# EAGLE board 527_faboblocks (EAGLE 9.6.2)
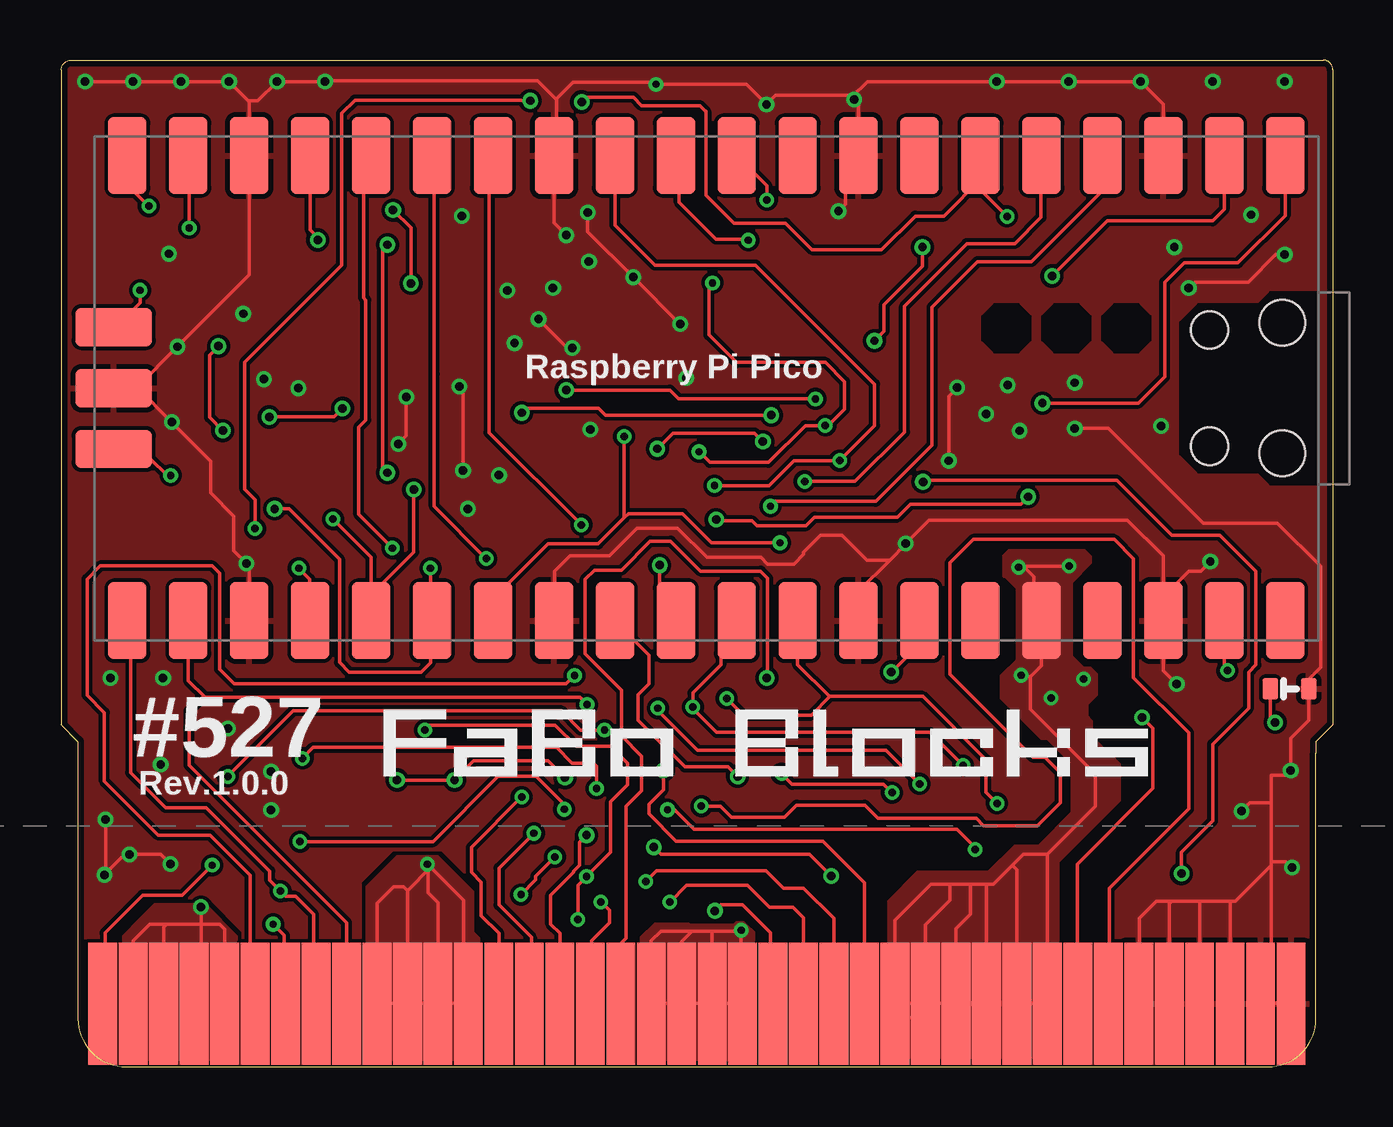
[diagram p0: board, top side]
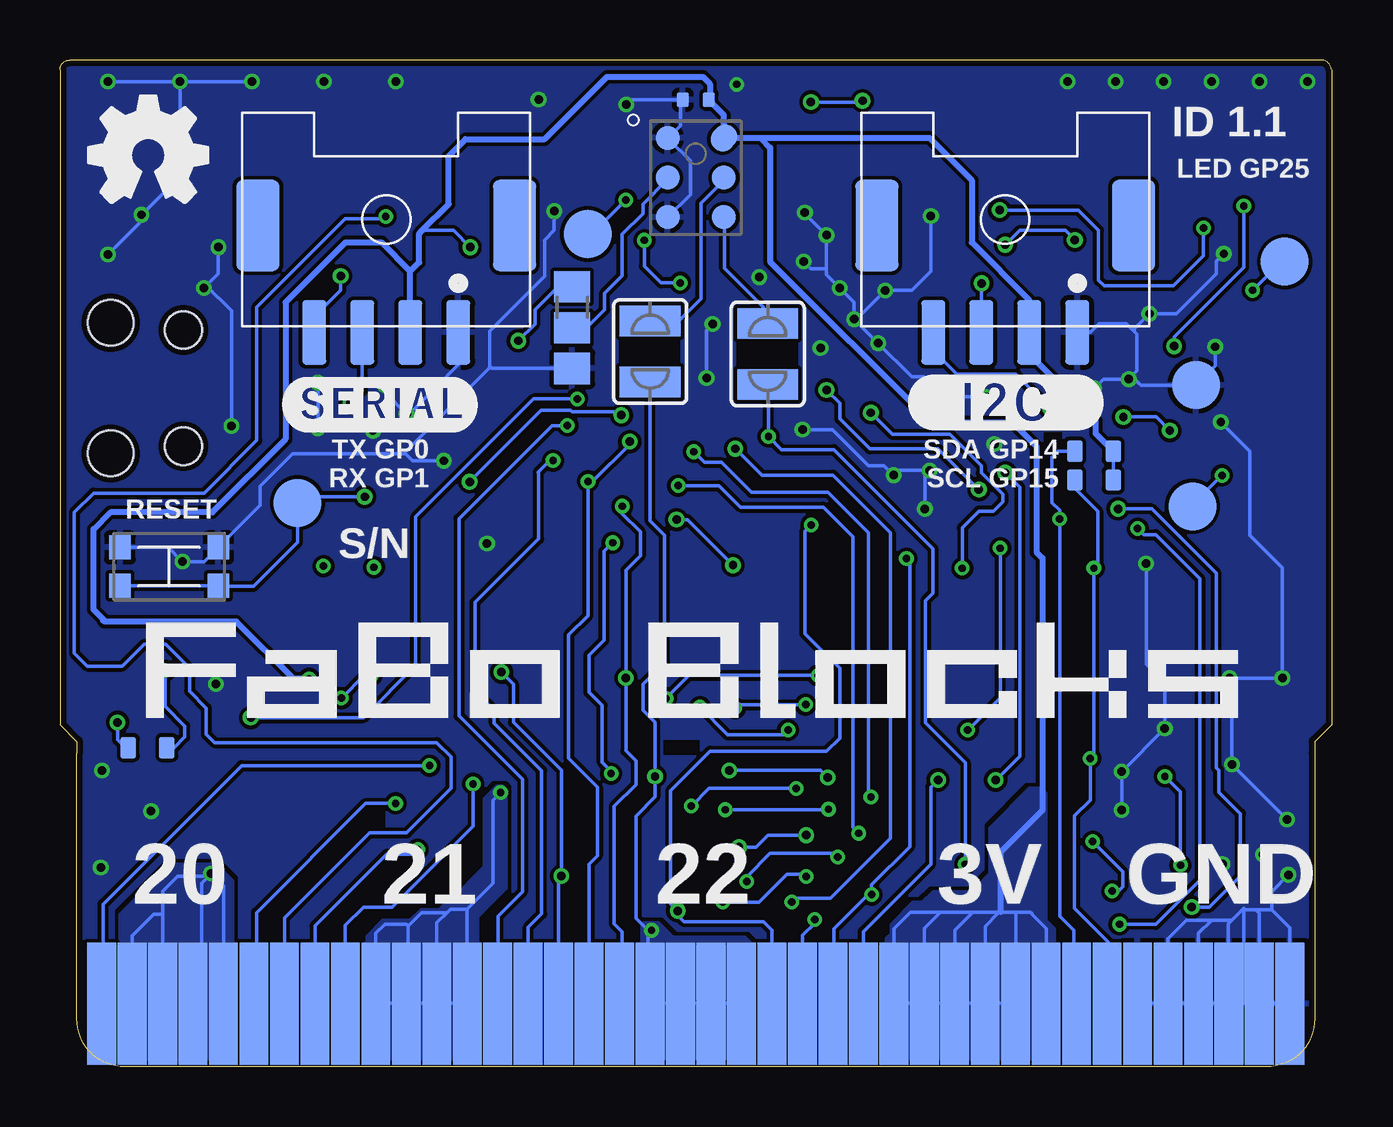
[diagram p1: board, bottom side, seen from below]

Size 53 x 41.95 mm. Coordinates in mm from the lower left corner, seen from the top.
Outline: 0.7,13.07 0.7,13.55 0,14.25 0,41.55 arc-77 0.4,41.95 52.6,41.95 arc-90 53,41.55 53,14.25 52.3,13.55 52.3,13.07
Copper layers (1*16): Top 0.035mm / dielectric 1.6mm / Bottom 0.035mm
Design rules "PCBway": minimum track width 6mil, minimum drill 12mil, track to track 6mil, track to pad 6mil, pad to pad 6mil, via to via 6mil, smd to smd 6mil, copper to edge 10mil, drill to drill 10mil, minimum pad ring 10mil, minimum via ring 6mil, stop-mask expansion 2mil, vias tented up to drill 100mil, thermal gap 8mil
bRestrict: area 22.2,29.2 to 24.8,30.2; area 27.1,29.3 to 29.7,30.3; area 11.2,25.8 to 12,26.4; area 39.5,10 to 40.2,10.6; area 38.1,8 to 38.9,8.6; area 26.4,13 to 27.1,13.6; area 27.1,13 to 27.9,13.6

## Footprints (pad centres in the part's own frame; a part is rotated, then mirrored left to right if it is on the bottom)
0402 = smd 0.5 x 0.6: 1 -0.55,0; 2 0.55,0
SM04B-PASS = smd 1 x 2.7: 1 3,-11.85; 2 1,-11.85; 3 -1,-11.85; 4 -3,-11.85 | smd 1.8 x 3.8: P$1 5.35,-7.4; P$2 -5.35,-7.4
TP20R = smd 2 x 2: TP 0,0
A0R-JMP = smd 1.5 x 1.3: 1 0,1.7; 2 0,0; 3 0,-1.7
0603 = smd 0.65 x 0.9: ANODE -0.8,0; CATHODE 0.8,0
0603' = smd 0.65 x 0.9: 1 -0.8,0; 2 0.8,0
KMR2 = smd 0.9 x 1: 1 -2.05,0.8; 2 2.05,0.8; 3 2.05,-0.8; 4 -2.05,-0.8
SJW = smd 1.27 x 2.54: 1 -1.27,0; 2 1.27,0
RASPBERRY_PI_PICO_SMD = smd 3.2 x 1.6: 1 -9.69,24.13; 2 -9.69,21.59; 3 -9.69,19.05; 4 -9.69,16.51; 5 -9.69,13.97; 6 -9.69,11.43; 7 -9.69,8.89; 8 -9.69,6.35; 9 -9.69,3.81; 10 -9.69,1.27; 11 -9.69,-1.27; 12 -9.69,-3.81; 13 -9.69,-6.35; 14 -9.69,-8.89; 15 -9.69,-11.43; 16 -9.69,-13.97; 17 -9.69,-16.51; 18 -9.69,-19.05; 19 -9.69,-21.59; 20 -9.69,-24.13; 21 9.69,-24.13; 22 9.69,-21.59; 23 9.69,-19.05; 24 9.69,-16.51; 25 9.69,-13.97; 26 9.69,-11.43; 27 9.69,-8.89; 28 9.69,-6.35; 29 9.69,-3.81; 30 9.69,-1.27; 31 9.69,1.27; 32 9.69,3.81; 33 9.69,6.35; 34 9.69,8.89; 35 9.69,11.43; 36 9.69,13.97; 37 9.69,16.51; 38 9.69,19.05; 39 9.69,21.59; 40 9.69,24.13 | smd 1.6 x 3.2: D1 -2.54,-24.7; D2 0,-24.7; D3 2.54,-24.7 | hole 1.9: 2.725,24; -2.725,24 | hole 1.55: 2.425,20.97; -2.425,20.97
SPM4050 = smd 1 x 1: 1:GND -1.169,1.651; 2:LEFT/RIGHT -1.169,0; 3:GND -1.169,-1.651; 4:CLOCK 1.169,-1.651; 5:DATA 1.169,0 | smd 1.15 x 1 rotated 45: 6:VDD 1.169,1.651
BBC_EDGE = smd 1.2 x 5.08: P$1 -50.215,2.673; P$2 -48.945,2.673; P$3 -47.675,2.673; P$4 -46.405,2.673; P$5 -45.135,2.673; P$6 -43.865,2.673; P$7 -42.595,2.673; P$8 -41.325,2.673; P$9 -40.055,2.673; P$10 -38.785,2.673; P$11 -37.515,2.673; P$12 -36.245,2.673; P$13 -34.975,2.673; P$14 -33.705,2.673; P$15 -32.435,2.673; P$16 -31.165,2.673; P$17 -29.895,2.673; P$18 -28.625,2.673; P$19 -27.355,2.673; P$20 -26.085,2.673; P$21 -24.815,2.673; P$22 -23.545,2.673; P$23 -22.275,2.673; P$24 -21.005,2.673; P$25 -19.735,2.673; P$26 -18.465,2.673; P$27 -17.195,2.673; P$28 -15.925,2.673; P$29 -14.655,2.673; P$30 -13.385,2.673; P$31 -12.115,2.673; P$32 -10.845,2.673; P$33 -9.575,2.673; P$34 -8.305,2.673; P$35 -7.035,2.673; P$36 -5.765,2.673; P$37 -4.495,2.673; P$38 -3.225,2.673; P$39 -1.955,2.673; P$40 -0.685,2.673 | smd 1.2 x 5.08 bottom: P$41 -0.685,2.673; P$42 -1.955,2.673; P$43 -3.225,2.673; P$44 -4.495,2.673; P$45 -5.765,2.673; P$46 -7.035,2.673; P$47 -8.305,2.673; P$48 -9.575,2.673; P$49 -10.845,2.673; P$50 -12.115,2.673; P$51 -13.385,2.673; P$52 -14.655,2.673; P$53 -15.925,2.673; P$54 -17.195,2.673; P$55 -18.465,2.673; P$56 -19.735,2.673; P$57 -21.005,2.673; P$58 -22.275,2.673; P$59 -23.545,2.673; P$60 -24.815,2.673; P$61 -26.085,2.673; P$62 -27.355,2.673; P$63 -28.625,2.673; P$64 -29.895,2.673; P$65 -31.165,2.673; P$66 -32.435,2.673; P$67 -33.705,2.673; P$68 -34.975,2.673; P$69 -36.245,2.673; P$70 -37.515,2.673; P$71 -38.785,2.673; P$72 -40.055,2.673; P$73 -41.325,2.673; P$74 -42.595,2.673; P$75 -43.865,2.673; P$76 -45.135,2.673; P$77 -46.405,2.673; P$78 -47.675,2.673; P$79 -48.945,2.673; P$80 -50.215,2.673

## Placement (x,y rotation side)
C1  0.1uF  [0402]  26.5,40.3 0 bottom
CN1  [SM04B-PASS]  39.4,42.45 0 bottom
CN2  [SM04B-PASS]  13.6,42.45 0 bottom
GND  TPSQTP20R  [TP20R]  5.65,28.4 0 bottom
GP7  TPSQTP20R  [TP20R]  31,34.7 0 bottom
JMP1  0R-JUMPA  [A0R-JMP]  31.65,30.8 0 bottom
LED1  [0603]  51.2,15.75 0 top
LOGO1  [LOGO_OSHW_M_BOTTOM]  49.31,37.99 0 top
R1  470  [0603']  49.35,13.3 180 bottom
R2  [0603']  9.9,25.65 0 bottom
R3  [0603']  9.9,24.45 0 bottom
RESET  TPSQTP20R  [TP20R]  43.1,23.5 0 bottom
S2  [KMR2]  48.45,20.84 180 bottom
SJ1  [SJW]  23.5,29.7 270 bottom
SJ2  [SJW]  28.4,29.8 270 bottom
SWDCLK  TPSQTP20R  [TP20R]  1.95,33.55 0 bottom
SWDIO  TPSQTP20R  [TP20R]  5.8,23.35 0 bottom
U1  [RASPBERRY_PI_PICO_SMD]  26.89,28.28 270 top
U$1  SPM0405H  [SPM4050]  26.5,37.05 0 bottom
U$2  BBC_EDGE  [BBC_EDGE]  51.95,-0.05 0 top

## Library data of the parts
C1 = FaBo-Capacitor
CN1 CN2 = FaBo-Connetor
GND GP7 RESET SWDCLK SWDIO = testpad
JMP1 = jump-0r-smd
LED1 = FaBo-LED
LOGO1 = FaBo-Logo
R1-R3 = FaBo-Resistors
S2 = FaBo-Switch
SJ1 SJ2 = jumper
U1 = FaBo-Boards
U$1 = FaBo-Sensor
U$2 = microbit

## Nets
3V3: C1.2 CN1.2 CN2.2 JMP1.1 R2.2 R3.2 U1.36 U$1.6:VDD U$2.P$27 U$2.P$28 U$2.P$29 U$2.P$30 U$2.P$31 U$2.P$32 U$2.P$67 U$2.P$68 U$2.P$69 U$2.P$70 U$2.P$71 U$2.P$72
A0: U1.31 U$2.P$1 U$2.P$41
A1: U1.32 U$2.P$6 U$2.P$46
A2: U1.34 U$2.P$16 U$2.P$56
D2: U1.4 U$2.P$18 U$2.P$58
D3: U1.5 U$2.P$17 U$2.P$57
D4: U1.6 U$2.P$7 U$2.P$47
D5_PWM: U1.7
D6_PWM: U1.9
D8: U1.11 U$2.P$14 U$2.P$54
D9_LEDS: U1.12 U$2.P$15 U$2.P$55
GND: C1.1 CN1.1 CN2.1 GND.TP JMP1.3 LED1.CATHODE S2.3 S2.4 U1.3 U1.8 U1.13 U1.18 U1.23 U1.28 U1.33 U1.38 U1.D2 U$1.1:GND U$1.3:GND U$2.P$35 U$2.P$36 U$2.P$37 U$2.P$38 U$2.P$39 U$2.P$40 U$2.P$75 U$2.P$76 U$2.P$77 U$2.P$78 U$2.P$79 U$2.P$80
GP14_I2C1_SDA: CN2.3 U1.19
GP15_I2C1_SCL: CN2.4 U1.20
GP16_PWM_UART0_TX: U1.21 U$2.P$8 U$2.P$48
GP17_PWM_UART0_RX: U1.22 U$2.P$9 U$2.P$49
GP20_BUZZER: U1.26 U$2.P$2 U$2.P$3 U$2.P$4 U$2.P$5 U$2.P$42 U$2.P$43 U$2.P$44 U$2.P$45
I2C1_SCL: R2.1 U1.25 U$2.P$33 U$2.P$73
I2C1_SDA: R3.1 U1.24 U$2.P$34 U$2.P$74
N$1: R1.1 U1.39
N$2: LED1.ANODE R1.2
N$3: GP7.TP U1.10
N$5: JMP1.2 U$1.2:LEFT/RIGHT
N$6: SJ1.1 U$1.4:CLOCK
N$7: SJ2.1 U$1.5:DATA
PDM_CLK: SJ1.2 U1.27 U$2.P$10 U$2.P$11 U$2.P$12 U$2.P$13 U$2.P$50 U$2.P$51 U$2.P$52 U$2.P$53
PDM_DIN: SJ2.2 U1.29 U$2.P$19 U$2.P$20 U$2.P$21 U$2.P$22 U$2.P$59 U$2.P$60 U$2.P$61 U$2.P$62
RESET: RESET.TP S2.1 S2.2 U1.30
RX: CN1.4 U1.2
SPI1_CSN: U1.17 U$2.P$26 U$2.P$66
SPI1_RX: U1.16 U$2.P$24 U$2.P$64
SPI1_SCK: U1.14 U$2.P$23 U$2.P$63
SPI1_TX: U1.15 U$2.P$25 U$2.P$65
SWCLK: SWDCLK.TP U1.D1
SWDIO: SWDIO.TP U1.D3
TX: CN1.3 U1.1

## Tracks (layer width: path | path; a pad name or v marks a point on that pad's centre or on a via)
3V3  (via drill 0.3, 0.35)
  Top 0.152: U$2.P$27 34.9,2.64 35.97,2.64 U$2.P$28 | U$2.P$29 37.34,2.64 38.56,2.64 | 39.78,2.64 U$2.P$31 | 40.84,2.64 39.93,2.64 U$2.P$31 | 40.84,2.64 41,2.64 U$2.P$32 | 36.45,2.64 37.19,2.64 U$2.P$29 | 36.45,2.64 36.12,2.64 U$2.P$28 | 40.84,2.64 U$2.P$32 | U$2.P$32 41.1,8.85 | 41.1,8.85 43.1,10.85 43.1,12.2 40.4,14.9 40.4,16.25 | 40.4,16.25 40.86,16.71 U1.36 40.55,18.9 40.55,20.41 40.1,20.86 | 41.1,8.85 40.1,8.85 39.65,8.4 | 38.6,7.6 38.85,7.6 39.65,8.4 | 38.6,7.6 37.9,7.6 | 37.9,7.6 37.05,7.6 | 37.05,7.6 36.25,7.6 34.75,6.1 34.75,2.2 34.9,2.05 35.86,2.05 36.45,2.64 | U$2.P$28 36.02,5.92 37.05,6.95 37.05,7.6 | U$2.P$29 37.3,5.74 37.9,6.35 37.9,7.6 | U$2.P$30 38.56,7.56 38.6,7.6 | U$2.P$31 39.84,8.21 39.65,8.4 | v42.02,20.86 40.1,20.86 | 40.1,20.86 39.97,20.86 v39.91,20.81 | 40.4,16.25 40.08,16.25 v40.02,16.31 | v35.9,34.15 35.9,33.35 34.3,31.75 34.3,30.65 v33.9,30.25
  Top 1.27: 38.56,2.64 U$2.P$30
  Bottom 0.152: 13.11,2.64 U$2.P$71 | U$2.P$70 14.33,2.64 13.26,2.64 U$2.P$71 | U$2.P$69 15.85,2.64 16.92,2.64 U$2.P$68 | U$2.P$67 18.14,2.64 17.07,2.64 U$2.P$68 | U$2.P$70 14.48,2.64 15.7,2.64 U$2.P$69 | 18.29,2.64 U$2.P$67 | R2.2 | 25.91,40.23 C1.2 | 25.45,38.76 U$1.6:VDD | R2.2 R3.2 | R2.2 9.3,25.85 | 32.15,32.7 32.05,32.7 32.25,32.5 | 32.25,32.5 JMP1.1 | U$1.6:VDD 24.89,38.7 | 25.18,38.85 U$1.6:VDD | U$2.P$70 14.44,5.86 13.9,6.4 | 13.9,6.4 13.85,6.45 13.8,6.45 13.1,6.45 | U$2.P$69 15.71,5.69 14.95,6.45 | 14.95,6.45 13.95,6.45 13.9,6.4 | U$2.P$68 16.98,5.77 16.3,6.45 | 16.3,6.45 14.95,6.45 | U$2.P$67 18.25,5.75 17.55,6.45 16.3,6.45 | v40.02,16.31 40.31,16.31 v41.27,15.36 42.06,16.16 v42.62,16.16 | 13.1,6.45 12.55,6.45 12.5,6.4 12.5,6.35 11.89,5.74 U$2.P$72 | 13.1,6.45 13.16,6.38 U$2.P$71 | CN1.2 38.32,30.68 | 37.9,34.85 36.6,34.85 v35.9,34.15 | v33.9,30.25 33.2,30.95 33.2,31.55 32.25,32.5
  Bottom 0.254: v42.62,16.16 43.26,16.16 45.65,18.55 51.15,18.55 | 51.2,18.6 51.15,18.55 | 51.15,18.55 51.15,18.6 51.6,19.05 51.6,22.4 50.9,23.1 46.65,23.1 43.6,26.15 43.6,31.85 41.1,34.35 39.6,34.35 38.4,33.15 | 23.8,38.7 U$1.6:VDD 25.33,39.65 25.91,40.23 25.91,40.95 26.2,41.25 30.2,41.25 32.8,38.65 36.1,38.65 36.8,37.95 36.8,35.95 37.9,34.85 38.03,34.72 38.03,33.52 38.4,33.15 | R2.2 9.83,26.38 9.83,26.91 12.6,29.68 CN2.2 12.6,31.95 15,34.35 15,36.95 16.75,38.7 23.8,38.7 | CN1.2 38.4,33.15 | 23.8,38.7 23.4,38.3 23.4,33.55 16.7,26.85 13.3,26.85 12.3,25.85 12.3,21.45 12.05,21.2 12.05,10.7 13.8,8.95 13.8,6.45
  pour Top (no thermals): 39.85,16.95 39.85,19.95 39.35,20.45 39.3,20.45 39.3,21.3 39.5,21.5 42.65,21.5 42.9,21.25 42.9,21 42.1,20.2 42.1,17.1 42.6,16.6 42.9,16.6 43.15,16.35 43.15,15.5 42.75,15.1 42.75,14.6 42.95,14.4 42.95,13.75 44.1,12.6 44.1,11.1 41.55,8.55 41.55,0.95 41,0.4 34.7,0.4 34.5,0.6 34.5,6.9 35.7,8.1 38.65,8.1 39.75,9.2 40.75,9.2 42.15,10.6 42.15,12.65 41.1,13.7 40.85,13.7 39.2,15.35 39.2,16.3
  pour Bottom (no thermals): 11.55,-0.1 11.55,5.75 11.9,6.1 11.9,11.4 12.1,11.6 12.6,11.6 14.25,9.95 14.25,8.05 15,7.3 16.6,7.3 17.05,6.85 17.45,6.85 18.35,5.95 18.35,5.55 18.55,5.35 18.55,0.05 18.1,-0.4 11.85,-0.4
A0  (via drill 0.3)
  Top 0.152: v37.6,12.55 36.22,13.93 27.32,13.93 26.33,14.92 v26.33,14.99 26.33,15.57 27.5,16.75 27.5,17.93 U1.31 28.04,18.49 | v6.3,8.4 5.05,7.15 3.4,7.15 1.83,5.58 1.83,2.64 U$2.P$1 | v22.65,14.03 21.65,14.03 20.85,14.83 9.68,14.83 v6.95,12.1
  Bottom 0.152: v37.6,12.55 45.43,12.55 51.21,6.77 51.21,2.64 U$2.P$41 | v6.95,12.1 6.3,11.45 v6.3,8.4 | v22.65,14.03 22.85,13.83 25.17,13.83 v26.33,14.99
A1  (via drill 0.3)
  Top 0.152: 8.23,2.64 U$2.P$6 7.88,3.09 7.88,7.98 7.86,8 | v21.4,16.3 21.05,15.95 7.22,15.95 6.61,16.57 6.61,20.56 6.3,20.87 1.63,20.87 1.08,20.31 1.08,15.48 1.8,14.76 1.8,11.9 4.05,9.65 6.21,9.65 7.86,8 | U1.32 30.7,16.75 32.02,15.43 32.05,15.43 | v27.74,15.34 28.44,14.65 31.27,14.65 32.05,15.43 | v39.01,10.97 38.55,11.43 38.55,12.8 35.91,15.43 32.05,15.43 | 7.86,8
  Bottom 0.152: 44.96,2.64 U$2.P$46 44.81,2.64 44.81,6.42 40.26,10.97 v39.01,10.97 | v21.4,16.3 26.78,16.3 v27.74,15.34
A2  (via drill 0.35)
  Top 0.152: 35.78,17.33 U1.34 | U1.34 36.25,18.12 | U1.34 35.78,17.63 v34.6,16.45 | U$2.P$16 20.79,5.56 20.4,5.95 20.4,7.15 21.36,8.11 21.36,8.15 21.6,8.38 21.6,9.35 v21.9,9.65 | v24.7,9.15 25,8.85 31.2,8.85 v32.1,7.95
  Bottom 0.152: v34.6,16.45 34.1,15.95 34.1,14.35 32.1,12.35 v32.1,7.95 32.22,7.83 U$2.P$56 | v21.9,9.65 23.5,9.65 24,9.15 v24.7,9.15
D2  (via drill 0.3, 0.35)
  Top 0.152: 23.47,2.64 U$2.P$18 | 43.28,36.47 43.28,37.84 U1.4 43.4,36.5 40.45,33.55 38.2,33.55 36.3,31.65 36.3,25.9 33.95,23.55 29.76,23.55 v29.56,23.35 | U$2.P$18 23.37,2.66 | U$2.P$18 23.32,5.12 23.55,5.35 23.55,10.85 24.2,11.5 24.2,12.95 23.35,13.8 23.35,14.1 23.37,14.11 23.37,15.69 21.85,17.22 21.85,20.31 22.23,20.7 23.35,20.7 24.55,21.9 25.4,21.9 26.65,20.65 29.15,20.65 29.45,20.35 29.45,16.23 v29.41,16.2
  Bottom 0.152: v29.56,23.35 29.56,23.05 28.8,22.29 28.8,21.29 29.41,20.68 v29.41,16.2 29.41,13.16 29,12.75 29,11.75 29.9,10.85 29.9,5.96 29.57,5.63 29.57,2.64 U$2.P$58
D3  (via drill 0.3, 0.35)
  Top 0.152: v30.99,24.39 33.09,24.39 35.15,26.45 35.15,31.7 37.75,34.3 39.75,34.3 40.84,35.39 40.84,37.84 U1.5 | 22.5,2.8 22.18,2.67 | 22.18,2.67 U$2.P$17 | v29.25,26.05 28.9,26.4 25.5,26.4 v24.85,25.75 | v22.5,6.87 22.85,6.51 22.85,6 22.1,5.25 22.1,2.75 22.18,2.67
  Bottom 0.152: 30.99,2.66 U$2.P$57 30.95,8.44 30.6,8.79 30.6,11.65 31.8,12.85 31.8,18 31,18.8 31,24.38 v30.99,24.39 30.81,24.39 29.25,25.95 v29.25,26.05 | v22.5,6.87 22.35,7.02 20.9,7.02 18.39,9.53 18.39,22.25 20.79,24.65 23.75,24.65 v24.85,25.75
D4  (via drill 0.3, 0.35)
  Top 0.152: 9.45,2.64 U$2.P$7 9.3,2.64 9.3,5.48 v8.84,5.94 | 38.41,37.05 38.41,36.45 v39.42,35.43 | U1.6 38.41,37.84 38.41,37.05 | 26.88,39.8 26.88,36.32 28.05,35.15 30.2,35.15 31.3,34.05 34.2,34.05 35.6,35.45 36.8,35.45 38.41,37.05 | 26.88,39.8 26.88,39.81 | v8.08,22.42 8.08,23.62 7.65,24.05 7.65,29.35 11.69,33.39 11.69,39.72 12.25,40.28 19.2,40.28 19.23,40.25 v19.55,40.25 | v21.7,40.2 21.73,40.17 21.95,40.4 23.85,40.4 24.2,40.05 26.63,40.05 26.88,39.8
  Bottom 0.152: U$2.P$47 43.74,2.64 44.04,2.94 U$2.P$47 | v39.42,35.43 39.52,35.33 41.12,35.33 44.8,31.65 44.8,26.1 47,23.9 51.6,23.9 52.4,23.1 52.4,17.23 51.86,16.7 50.4,16.7 49.5,17.6 48.6,17.6 47.6,16.6 47.6,15.65 46.9,14.95 46.9,13.85 46.56,13.51 37.3,13.51 36.7,12.91 36.7,11.6 38.55,9.75 40.1,9.75 43.65,6.2 U$2.P$47 | v8.84,5.94 7.33,5.94 5.49,7.78 5.49,20.33 7.33,22.17 7.83,22.17 v8.08,22.42 | v21.7,40.2 19.6,40.2 v19.55,40.25
D8  (via drill 0.3)
  Top 0.152: 18.14,2.64 U$2.P$14 | v28.64,34.44 28.59,34.49 27.29,34.49 25.76,36.02 25.76,37.84 U1.11 | 18.29,2.64 U$2.P$14 | v26.58,25.63 27.03,25.18 29.48,25.18 31.02,26.72 v31.85,26.72 31.97,26.72 32.65,27.4 32.65,28.55 31.85,29.35 28.15,29.35 27,30.5 27,32.51 v27.15,32.66 | U$2.P$14 18.25,5.55 17.5,6.3 17.5,7.7 17.1,8.1 17.1,9.14 v19.2,11.24
  Bottom 0.152: v27.15,32.66 27.95,32.66 28.64,33.36 v28.64,34.44 | v31.85,26.72 32.5,26.72 36.37,22.84 36.37,14.62 33.72,11.97 33.72,7.3 34.75,6.27 34.75,2.64 U$2.P$54 | v19.2,11.24 19.3,11.34 19.3,22.24 20.98,23.93 24.18,23.93 25.43,25.18 26.13,25.18 v26.58,25.63
D9_LEDS  (via drill 0.3)
  Top 0.152: U$2.P$15 19.61,2.71 19.61,5.39 18.25,6.75 18.25,8.27 v19.71,9.73 | v27.23,24.21 29.5,24.21 30.54,25.25 v32.45,25.25 33.9,26.71 33.9,28.45 28.95,33.4 24.75,33.4 23.08,35.07 U1.12
  Bottom 0.152: v32.45,25.25 32.52,25.33 33.05,24.8 | 33.07,24.78 33.05,24.8 | 33.38,2.64 U$2.P$55 33.48,5.8 32.92,6.37 32.92,12.33 34.91,14.32 34.91,14.85 35.7,15.65 35.7,19.35 33.05,22 33.05,24.8 | v19.71,9.73 19.96,9.98 19.96,22.09 21.18,23.31 24.63,23.31 25.53,24.21 v27.23,24.21
GND  (via drill 0.3, 0.35)
  Top 0.152: U$2.P$35 44.96,2.64 44.95,2.65 44.95,6.2 45.65,6.9 46.3,6.9 | U$2.P$40 51.21,2.64 50.44,2.64 50.44,8.4 | 50.44,11 50.44,12.15 51.05,12.15 v51.25,12.35 51.25,13.7 52,14.45 LED1.CATHODE 52,16.15 52.5,16.65 52.5,20.85 50.7,22.65 47.6,22.65 43.65,26.6 v42.25,26.6 | 50.44,11 50.44,8.55 | 50.44,8.55 50.44,8.4 | 45.94,39.23 U1.3 45.94,40.11 v45,41.05 v42,41.05 v39,41.05 33.6,41.05 32.95,40.4 | 3.16,28.32 v4.62,26.86 6.24,25.24 6.24,23.91 7.2,22.95 7.2,21.5 v7.72,20.97 7.84,20.86 U1.23 | 20.54,17.46 U1.28 20.57,18.64 20.57,20.65 21.22,21.3 22.85,21.3 24,22.45 25.7,22.45 26.92,21.22 29.17,21.22 29.45,20.95 30.55,20.95 30.95,21.35 30.95,21.45 31.65,22.15 32.55,22.15 33.59,21.11 34.54,21.11 | 3.16,28.32 2.69,27.84 2.29,28.24 2.23,28.24 U1.D2 | U1.33 33.24,19.81 34.54,21.11 | U1.38 45.94,21.28 44.45,22.77 36.18,22.77 v35.2,21.8 35.2,21.77 34.54,21.11 | U1.18 7.84,37.91 | U1.18 7.84,32.99 v4.85,30 3.16,28.32 | 20.62,40.32 19.86,41.08 11.04,41.08 v11,41.05 v9,41.05 8.2,40.25 7.8,40.25 | 20.62,40.32 20.65,40.3 20.65,38.08 U1.13 20.54,35.16 v21.05,34.65 | 20.62,40.32 21.33,41.03 24.7,41.03 v24.8,40.93 28.56,40.93 v29.4,40.1 29.78,40.48 32.87,40.48 32.95,40.4 | 50.44,8.4 48.94,6.9 48.7,6.9 | v37.35,28.3 37,27.95 v37,25.25 | v1,41.05 v3,41.05 v5,41.05 v7,41.05 7.8,40.25 | 7.8,40.25 7.84,40.21 U1.18 | v1.85,10.3 1.85,8.05 v1.8,8 2.65,8.85 v2.85,8.85 4.15,8.85 v4.55,8.45 | v21.95,35.6 21.95,34.8 v23.85,32.9 v25.8,30.95 | v51.3,8.3 51.05,8.55 50.44,8.55 | v49.2,10.65 49.55,11 50.44,11 | v46.5,15.95 45.94,16.51 U1.38 | v14.05,25.95 14.39,26.29 v14.39,27.91 | v16.75,24.85 16.75,28.2 v16.6,28.35
  Top 0.152: U1.8 33.24,38.15 | 33.24,38.15 33.24,40.11 v33.05,40.3 32.95,40.4 | v32.4,35.65 32.7,35.95 32.7,37.61 33.24,38.15 | v47,32.45 47.24,32.69 49.48,32.69 50.63,33.85 v51,33.85 | v21.3,29.95 21.1,29.95 v19.9,31.15 | 46.3,6.9 47.4,6.9 | 47.4,6.9 48.7,6.9 | U$2.P$36 46.19,6.78 46.3,6.9 | U$2.P$37 47.45,6.84 47.4,6.9 | U$2.P$38 48.73,6.87 48.7,6.9 | v47.9,21.05 47.5,20.65 47,20.65 45.94,19.59 U1.38
  Bottom 0.152: U$2.P$79 2.9,2.64 1.83,2.64 U$2.P$80 1.74,5.78 2.5,6.55 | 4.3,2.62 4.42,2.64 5.49,2.64 U$2.P$77 | 4.3,2.62 U$2.P$78 4.27,2.64 3.66,2.64 | U$2.P$76 6.71,2.64 5.64,2.64 U$2.P$77 | U$2.P$76 6.86,2.64 8.08,2.64 U$2.P$75 | 3.66,2.64 3.05,2.64 U$2.P$79 | 27.13,40.23 27.13,39.21 27.58,38.76 U$1.1:GND | 27.13,40.23 27.13,40.28 29.22,40.28 v29.4,40.1 | 27.13,40.23 C1.1 | U$1.1:GND 27.58,38.6 26.72,37.74 26.72,36.34 U$1.3:GND | 35.06,29.16 35.1,29.16 35.1,30.65 32.8,32.95 32.8,34.45 32.4,34.85 v32.4,35.65 | 27.74,38.6 U$1.1:GND | 3.66,6.55 3.66,6.6 4.18,6.08 | 3.66,6.55 3.66,2.64 | 35.06,29.16 38.63,25.58 | 38.63,25.58 38.67,25.55 43.3,25.55 44.65,24.2 44.65,23.39 S2.4 46.99,21.05 v47.9,21.05 48.49,21.64 S2.3 | 4.18,6.08 4.3,5.95 4.3,2.62 | U$2.P$77 5.54,5.55 5,6.1 | 5,6.1 4.2,6.1 4.18,6.08 | U$2.P$76 6.82,5.33 6.05,6.1 5,6.1 | 2.5,6.55 3.15,6.55 | 3.15,6.55 3.66,6.55 | U$2.P$79 3,6.4 3.15,6.55 | v37,25.25 38.3,25.25 38.63,25.58 | v51,33.85 49.6,35.25 v49.6,35.5 48,37.1 v48,41.05 | v48,41.05 v51,41.05 | v48,41.05 v45,41.05 | v1.8,8 2.5,7.3 2.5,6.55 | v21.95,35.6 21.95,35.55 v21.05,34.65 21.05,33.25 | v16.95,23.25 16.95,24.65 v16.75,24.85 18.05,24.85 v18.25,24.65 18.65,25.05 19.3,25.05 20.8,26.55 v22.05,26.55 | CN2.1 10.06,30.6 9.69,30.97 8.55,30.97 8.22,30.63 | 8.32,28.77 8.11,28.99 8.11,30.52 8.22,30.63 | 8.32,28.77 v8.45,28.65 9.52,28.65 v9.89,28.27 | v14.39,27.91 16.16,27.91 v16.6,28.35 17,28.74 17.5,28.74 v18.9,30.15 v19.9,31.15 19.9,31.25 | CN1.1 36.4,29.25 v37.35,28.3 38.45,27.2 v38.55,27.2 | v38.55,27.2 39.25,26.5 v39.95,26.5 42.15,26.5 v42.25,26.6 v42.25,28.5 | v39.45,28.4 39.45,28.1 v38.55,27.2
  Bottom 0.152: 21.05,33.25 21.05,33 v20.5,32.45 19.9,31.85 19.9,31.25 | v22,33.55 21.7,33.25 21.05,33.25 | 19.9,31.25 19.7,31.25 v18.6,32.35 17.5,32.35 16.7,33.15 v16.7,35.45 | v4.49,33.87 4.8,33.56 4.8,33.05 6.47,31.37 v7.59,31.37 8.22,30.75 8.22,30.63 | v4.85,30 4.85,29.2 GND.TP 7.95,28.4 8.32,28.77 | v1.85,10.3 v4.15,12.6 4.15,16.1 v4.25,16.2 v2.05,16.2 2.05,20.8 3.4,22.15 3.4,25.65 v4.62,26.86 | v7.72,20.97 7.72,16.77 6.95,16 v6.95,14.1 v8.75,12.3 v8.75,10.7 | v26.05,28.7 26.05,30.7 v25.8,30.95 | v47,32.45 46.9,32.55 | 46.9,32.55 46.4,33.05 v46.4,34.15 | JMP1.3 35,29.1 35.06,29.16 | v45.85,26.7 45.85,31.5 46.9,32.55
  pour Top (rank 6): -7.05,54.3 60.9,54.3 60.9,-10.8 -7.05,-10.8
  pour Bottom (rank 6): -7.1,54.9 61.45,54.9 61.45,-11.45 -7.1,-11.45
GP14_I2C1_SDA  (via drill 0.3, 0.35)
  Top 0.152: v5.33,34.95 5.33,37.93 U1.19 | v13.83,35.7 14.58,34.95 v14.58,32.64
  Bottom 0.152: v5.33,34.95 5.33,33.79 6.6,32.53 9.48,32.53 9.71,32.77 9.71,34.85 10.56,35.7 v13.83,35.7 | CN2.3 14.6,32.62 v14.58,32.64
GP15_I2C1_SCL  (via drill 0.3, 0.35)
  Top 0.152: U1.20 2.76,36.76 v3.66,35.86 | v6.74,26.5 6.19,27.05 6.19,29.65 v6.56,30.02 | v11.73,27.43 11.37,27.07 v8.68,27.07
  Bottom 0.152: v3.66,35.86 3.66,33.31 6.56,30.41 v6.56,30.02 | v11.73,27.43 13.15,28.85 15.61,28.85 16.6,29.84 CN2.4 | v6.74,26.5 7.31,27.07 v8.68,27.07
GP16_PWM_UART0_TX  (via drill 0.3)
  Top 0.152: 10.67,2.64 U$2.P$8 10.52,2.64 10.52,6.35 9.77,7.1 9.36,7.1 v9.14,7.32 8.7,7.76 8.7,8.15 6.05,10.8 4.35,10.8 2.9,12.25 2.9,18.49 U1.21 | v38.09,9.05 38.09,9.15 37.34,9.9 26.38,9.9 25.57,10.71 v25.27,10.71 | v20.97,10.73 20.97,10.93 19.8,12.1 18.22,12.1 15.5,9.38 v9.95,9.38
  Bottom 0.152: v25.27,10.71 21.24,10.71 21.22,10.73 v20.97,10.73 | v9.14,7.32 8.89,7.32 8.7,7.51 8.7,8.13 v9.95,9.38 | U$2.P$48 42.37,2.64 42.37,5.87 39.39,8.85 38.29,8.85 v38.09,9.05
GP17_PWM_UART0_RX  (via drill 0.3)
  Top 0.152: v35.78,11.79 34.38,13.19 26.52,13.19 24.87,14.84 v24.87,14.94 | 6,15.39 21.62,15.39 v21.92,15.09 | 6,15.39 5.9,15.39 5.33,14.82 5.33,12.56 11.89,6 U$2.P$9 | U1.22 5.3,16.09 6,15.39
  Bottom 0.152: v21.92,15.09 24.72,15.09 v24.87,14.94 | 41,2.64 U$2.P$49 41.1,5.89 40.35,6.65 39.15,6.65 35.78,10.01 v35.78,11.79
GP20_BUZZER  (via drill 0.3, 0.35)
  Top 0.152: 15.39,18.64 v15.39,20.77 | 15.39,18.64 U1.26 | 5.83,3.61 5.83,5.95 | 5.83,5.95 v5.83,6.65 | v8.9,23.25 9.5,23.25 11.6,21.15 11.6,16.85 12,16.45 15,16.45 15.39,16.84 15.39,18.64 | v46.7,8.05 46.7,8.95 48,10.25 48,13.45 49.5,14.95 49.5,16.45 49.8,16.75 49.8,20.65 48.3,22.15 46.3,22.15 44,24.45 36,24.45 v35.92,24.37 | v29.6,27.15 22.7,27.15 22.4,27.45 19.4,27.45 v19.2,27.25 | U$2.P$2 3,5.25 3.7,5.95 4.4,5.95 | 4.4,5.95 5.83,5.95 | U$2.P$3 4.28,5.82 4.4,5.95 | U$2.P$5 6.82,5.73 6.6,5.95 5.83,5.95
  Bottom 0.152: v5.83,6.65 5.09,6.65 3.8,7.95 3.8,10.55 4.7,11.45 4.7,12.36 4.81,12.47 4.81,20.55 7.5,23.25 v8.9,23.25 | U$2.P$44 47.1,2.98 47.1,7.65 46.8,7.95 | 46.8,7.95 v46.7,8.05 46.19,7.53 U$2.P$45 | v35.92,24.37 32.95,27.35 31.72,27.35 31.66,27.29 29.75,27.29 v29.6,27.15 | v19.2,27.25 18.3,26.35 15.9,26.35 14.6,25.05 14.6,24.75 13.7,23.85 13.7,23.55 14.1,23.15 14.7,23.15 15.39,22.46 v15.39,20.77 | U$2.P$43 48.73,6.35 | 48.73,6.35 48.73,7.32 48.1,7.95 46.8,7.95 | U$2.P$42 49.99,5.45 49.1,6.35 48.73,6.35
  pour Bottom (no thermals): 45.8,-0.35 45.8,7.75 46.5,8.45 48.4,8.45 49.3,7.55 50.5,6.35 50.5,-0.35 50.3,-0.55 46,-0.55
  pour Top (no thermals): 2.6,-0.35 2.6,5.45 3.3,6.15 3.9,6.75 6,6.75 7.3,5.45 7.3,-0.15 6.8,-0.65 2.9,-0.65
I2C1_SCL  (via drill 0.3, 0.35)
  Top 0.152: v31.44,27.83 25.74,27.83 25.37,28.2 v21.05,28.2 | U$2.P$33 42.35,2.65 42.35,8.45 45.5,11.6 45.5,14.1 v45.05,14.55 | v11.33,22.82 12.92,21.23 U1.25 12.92,19.67 14.7,21.45 v14.7,24.05
  Bottom 0.152: 10.52,2.64 U$2.P$73 10.67,2.64 10.67,1.98 10.7,1.95 10.75,1.95 10.75,5.7 11.33,6.28 v11.33,22.82 11.33,23.18 11.65,23.5 11.65,25.4 11.4,25.65 R2.1 | v31.44,27.83 33.25,27.83 38.17,22.91 38.17,16.73 40.35,14.55 v45.05,14.55 | v14.7,24.05 16.4,25.75 19.25,25.75 20.5,27 20.5,27.65 v21.05,28.2
I2C1_SDA  (via drill 0.3)
  Top 0.152: v9.91,20.77 10.36,20.32 10.36,18.64 U1.24 | v10.06,12.85 10.51,13.3 20.64,13.3 21.3,12.65 22.2,12.65 22.32,12.53 v22.32,11.59 | 43.74,2.64 U$2.P$34 43.7,2.68 43.7,7.45 47,10.75 47,13.91 44.7,16.21 44.7,21.16 43.9,21.97 38.02,21.97 37.05,21 37.05,16.35 40.5,12.9 41,12.9 41.65,12.25 41.65,11 40.7,10.05 38.45,10.05 38.15,10.35 34.05,10.35 33.5,10.9 30.65,10.9 30.15,10.4 27.95,10.4 27.49,10.86 v26.68,10.86
  Bottom 0.152: v10.06,12.85 10.06,11.11 10.71,10.45 10.71,6.61 9.25,5.15 9.25,2.7 | 9.25,2.7 9.14,2.79 9.3,2.64 U$2.P$74 9.25,2.7 | v26.68,10.86 25.95,11.59 v22.32,11.59 | v10.06,12.85 9.91,12.85 v9.91,20.77 9.75,20.93 9.75,23.15 10.7,24.1 R3.1 | v10.06,12.85
N$1  (via drill 0.3)
  Top 0.152: v48.62,16.51 48.48,16.64 U1.39
  Bottom 0.152: 48.62,13.31 R1.1 48.25,13.3 47.8,13.75 47.8,14.2 48.62,15.01 v48.62,16.51
N$2  (via drill 0.35)
  Top 0.152: v50.6,14.35 50.4,14.55 LED1.ANODE
  Bottom 0.152: R1.2 50.29,13.31 50.6,13.61 v50.6,14.35
N$3  (via drill 0.3)
  Top 0.152: U1.10 29.41,36.71 v29.41,36.12
  Bottom 0.152: GP7.TP 30.83,34.7 v29.41,36.12
N$5
  Bottom 0.152: U$1.2:LEFT/RIGHT 27.67,36.98 28.7,35.95 28.7,35.55 29.57,34.68 29.57,32.96 30.3,32.23 30.3,31.55 31.05,30.8 JMP1.2
N$6
  Bottom 0.152: U$1.4:CLOCK 25.3,35.25 25.3,33.27 23.7,31.67 SJ1.1
N$7
  Bottom 0.152: SJ2.1 27.23,31.07 26.29,32.01 26.29,35.98 25.45,36.82 25.45,36.93 U$1.5:DATA
PDM_CLK  (via drill 0.3)
  Top 0.152: U$2.P$11 14.33,2.64 13.26,2.64 U$2.P$10 13.16,6.81 13.85,7.5 14.27,7.5 14.44,7.33 | U$2.P$12 15.85,2.64 16.92,2.64 U$2.P$13 16.77,2.83 16.77,6.94 15.4,8.3 | U$2.P$11 14.48,2.64 15.7,2.64 U$2.P$12 | U1.27 18,19.5 | 18,19.5 18,19.76 | v15.27,8.44 15.3,8.4 | 15.3,8.4 15.4,8.3 | v34.63,11.42 34.28,11.77 30.47,11.77 v30.03,12.21 | 29.91,21.78 v29.96,21.83 27.11,21.83 25.9,23.05 23.65,23.05 23.47,22.87 | 18,19.5 20.29,21.78 22.39,21.78 23.47,22.87 | v23.47,26.26 23.47,22.87 | U$2.P$11 14.44,7.33 | 14.44,7.33 15.4,8.3 | U$2.P$12 15.71,6.84 15.3,7.25 15.3,8.4
  Bottom 0.152: 38.71,2.64 39.78,2.64 U$2.P$50 39.84,5.56 39.45,5.95 38.55,5.95 38.48,5.87 | U$2.P$52 37.19,2.64 36.12,2.64 U$2.P$53 | 38.5,2.64 37.34,2.64 U$2.P$52 | 38.5,2.64 38.56,2.64 U$2.P$51 | SJ1.2 23.47,28.4 v23.47,26.26 22.92,25.71 20.75,25.71 16.61,21.58 16.61,19.72 16.92,19.41 16.92,14.33 15.27,12.67 v15.27,8.44 | v30.03,12.21 30.03,12.31 30.31,12.59 30.33,12.61 30.41,12.69 30.41,15.05 30.95,15.6 30.95,17.15 30.33,17.77 30.33,21.47 v29.96,21.83 | 35.97,2.64 U$2.P$53 | U$2.P$53 36.02,6.57 | v34.63,11.42 34.95,11.1 34.95,7.65 36.02,6.57 | 36.02,6.57 36.73,6.57 36.88,6.42 | U$2.P$52 37.3,6 36.88,6.42 | 36.88,6.42 37.92,6.42 38.48,5.87 | 38.5,2.64 38.5,5.85 38.48,5.87
  pour Bottom (no thermals): 35.7,0.2 35.6,0.3 35.6,5.9 35.6,6.25 34.8,7.05 34.4,7.45 34.4,10.55 34.4,11.55 34.5,11.65 34.55,11.7 34.8,11.7 35.3,11.2 35.3,8.35 36.7,6.95 36.8,6.95 37.2,6.55 37.95,6.55 38.4,6.1 39.2,6.1 39.55,6.1 40.2,5.45 40.2,-0.05 39.8,-0.45 38.95,-0.45 36.35,-0.45
  pour Top (no thermals): 12.75,-0.35 12.75,7.5 13.95,8.7 14,8.75 15.7,8.75 17.15,7.3 17.15,5.6 17.4,5.35 17.4,5.1 17.4,-0.15 17.3,-0.25 17.05,-0.5 12.95,-0.5 12.9,-0.5
PDM_DIN  (via drill 0.3, 0.35)
  Top 0.152: U$2.P$62 24.69,2.64 25.76,2.64 U$2.P$61 | 28.35,2.64 27.28,2.64 U$2.P$21 | U$2.P$61 25.91,2.64 27.13,2.64 U$2.P$21 | U1.29 24.51,17.16 24.51,15.96 24.05,15.5 24.05,14.45 26,12.5 27.8,12.5 v28.2,12.1 | 24.54,2.64 U$2.P$62 | v28.35,5.69 28.35,5.65 | 28.35,5.65 28.35,2.64 | 28.35,2.64 U$2.P$22 | U$2.P$61 25.86,5.21 26.3,5.65 | 26.3,5.65 27.2,5.65 | 27.2,5.65 28.35,5.65 | U$2.P$21 27.14,5.58 27.2,5.65 | U$2.P$62 24.59,5.24 25,5.65 26.3,5.65
  Bottom 0.152: 24.54,2.64 U$2.P$62 24.69,2.64 25.76,2.64 U$2.P$61 25.91,2.64 27.13,2.64 U$2.P$21 27.28,2.64 28.35,2.64 U$2.P$22 28.5,2.64 28.5,5.69 | 28.5,5.69 v28.35,5.69 28.2,5.69 | SJ2.2 28.4,22.75 27.8,22.15 27.8,16.85 28.7,15.95 28.7,14.85 28.2,14.35 v28.2,12.1 28.2,11.25 29,10.45 29,6.19 28.5,5.69
  pour Top (no thermals): 24.2,-0.05 24.2,5.4 24.75,5.95 26.15,5.95 26.2,5.9 28.05,5.9 28.15,6 28.45,6 28.55,5.9 28.85,5.6 28.85,-0.25 28.5,-0.6 24.6,-0.6 24.2,-0.2
  pour Bottom (no thermals): 24.1,0.05 24.1,5.05 24.45,5.4 27.45,5.4 28.05,6 28.65,6 28.75,5.9 28.75,0 28.45,-0.3 24.3,-0.3 24.1,-0.1 24.1,0
RESET  (via drill 0.35)
  Top 0.152: U1.30 24.95,19.26 v24.95,20.9 | v27.3,22.8 27.35,22.75 28.8,22.75 29,22.55 31.05,22.55 31.4,22.9 34.85,22.9 35.4,23.45 40,23.45 v40.3,23.75
  Bottom 0.152: S2.1 46.54,20.01 44.94,20.01 43.1,21.85 RESET.TP 42.85,23.75 v40.3,23.75 | v24.95,20.9 26.85,22.8 v27.3,22.8 | 46.31,20.12 S2.1 | S2.1 S2.2
RX  (via drill 0.35)
  Top 0.152: U1.2 48.48,35.73 48,35.25 43.6,35.25 v41.3,32.95
  Bottom 0.152: v41.3,32.95 41.3,32.35 42.4,31.25 CN1.4
SPI1_CSN  (via drill 0.35)
  Top 0.152: v14,11.95 v16.4,11.95 17.2,12.75 20.3,12.75 v21,12.05 | v13.6,24.75 13.4,24.95 13.4,34.05 v13.6,34.25 | v10.7,34.45 10.7,34.55 10.38,34.87 U1.17 | U$2.P$26 33.48,7.66 31.75,9.4 25.64,9.4 24.5,10.53 24.5,10.95 25.1,11.55 v25.1,12.35
  Bottom 0.152: U$2.P$66 19.52,5.63 16.7,8.45 16.7,11.65 v16.4,11.95 | v14,11.95 13,12.95 13,24.15 v13.6,24.75 | v13.6,34.25 13,34.85 11.1,34.85 v10.7,34.45 | v25.1,12.35 21.3,12.35 v21,12.05
SPI1_RX  (via drill 0.3)
  Top 0.152: 31.09,2.64 U$2.P$24 | v15.16,14.03 15.36,14.23 20.59,14.23 21.48,13.35 22.9,13.35 23.6,12.65 23.6,11.75 22.9,11.05 22.9,8.93 v21.9,7.93 21.54,7.57 v21.54,6.14 | U1.16 12.95,37.84 12.6,37.49 12.6,32.05 12.7,31.95 12.7,26.95 12.4,26.65 12.4,23.02 v13.81,21.61 | v25.37,6.86 26.07,7.56 28.6,7.56 29.51,6.65 30.5,6.65 30.95,6.2 U$2.P$24 | 30.94,2.64 U$2.P$24
  Bottom 0.152: v13.81,21.61 13.81,15.38 v15.16,14.03 | 21.95,2.64 U$2.P$64 22.05,5.47 21.54,5.99 v21.54,6.14 | v21.9,7.93 22,8.03 22.7,8.03 23.86,6.86 v25.37,6.86
SPI1_SCK  (via drill 0.3, 0.35)
  Top 0.152: 29.72,2.64 U$2.P$23 29.57,2.64 29.57,5.58 28.4,6.75 27.5,6.75 v27.25,6.5 | U1.14 17.83,37.8 17.83,26.42 v21.68,22.57
  Bottom 0.152: U$2.P$63 23.32,2.64 23.32,5.69 23.68,6.05 27,6.05 27.25,6.3 v27.25,6.5 27.55,6.8 27.55,11.5 25.9,13.15 21.05,13.15 20.5,13.7 20.5,16.6 21.95,18.05 21.95,22.31 v21.68,22.57
SPI1_TX  (via drill 0.3)
  Top 0.152: v17.72,21.17 15.54,23.35 15.54,28.87 15.54,37.84 U1.15 | v24.37,7.72 24.82,8.17 29.37,8.17 30.1,7.45 30.95,7.45 32.22,6.18 U$2.P$25 32.16,2.64 | v20.58,8.74 19.78,7.94 19.78,7.79 v19.17,7.17
  Bottom 0.152: v17.72,21.17 17.58,21.03 17.58,9.17 19.17,7.58 v19.17,7.17 19.32,7.17 20.75,5.74 20.75,2.66 U$2.P$65 20.73,2.64 20.73,4.92 | v24.37,7.72 24.37,7.92 23.4,8.89 20.73,8.89 v20.58,8.74
SWCLK  (via drill 0.3)
  Top 0.152: v3.29,32.35 3.29,31.84 2.29,30.83 U1.D1
  Bottom 0.152: v3.29,32.35 2.1,33.55 SWDCLK.TP
SWDIO  (via drill 0.3)
  Top 0.152: v4.57,24.64 4.42,24.64 3.72,25.34 2.6,25.34 2.29,25.65 U1.D3
  Bottom 0.152: v4.57,24.64 5.74,23.47 SWDIO.TP
TX  (via drill 0.35)
  Top 0.152: U1.1 51.02,35.47 49.05,33.5 46.81,33.5 46,32.69 46,28.75 44.9,27.65 v40.9,27.65
  Bottom 0.152: 40.4,30.99 CN1.3 40.4,28.15 v40.9,27.65

## Text on the board
tPlace: Raspberry Pi Pico | #527 | Rev.1.0.0
bPlace: ID 1.1 | LED GP25 | SDA GP14 | TX GP0 | SCL GP15 | RX GP1 | RESET | S/N | GND | 3V | 22 | 21 | 20
Document: #527 FaBo Blocks / Raspberry Pi Pico CardEdge / 2022/06/11 Rev1.0.0 ALPHA
bDocu: MIC | RESET